# Altium PCB Audio.PcbDoc
Units mil, origin at the board's own origin, x right, y up, seen from the top; angles counter-clockwise.
Board outline 6000 x 4000 mil, 2 copper layers (Top Layer, Bottom Layer); 19 components, 22 nets, 99 pads, 9 vias.
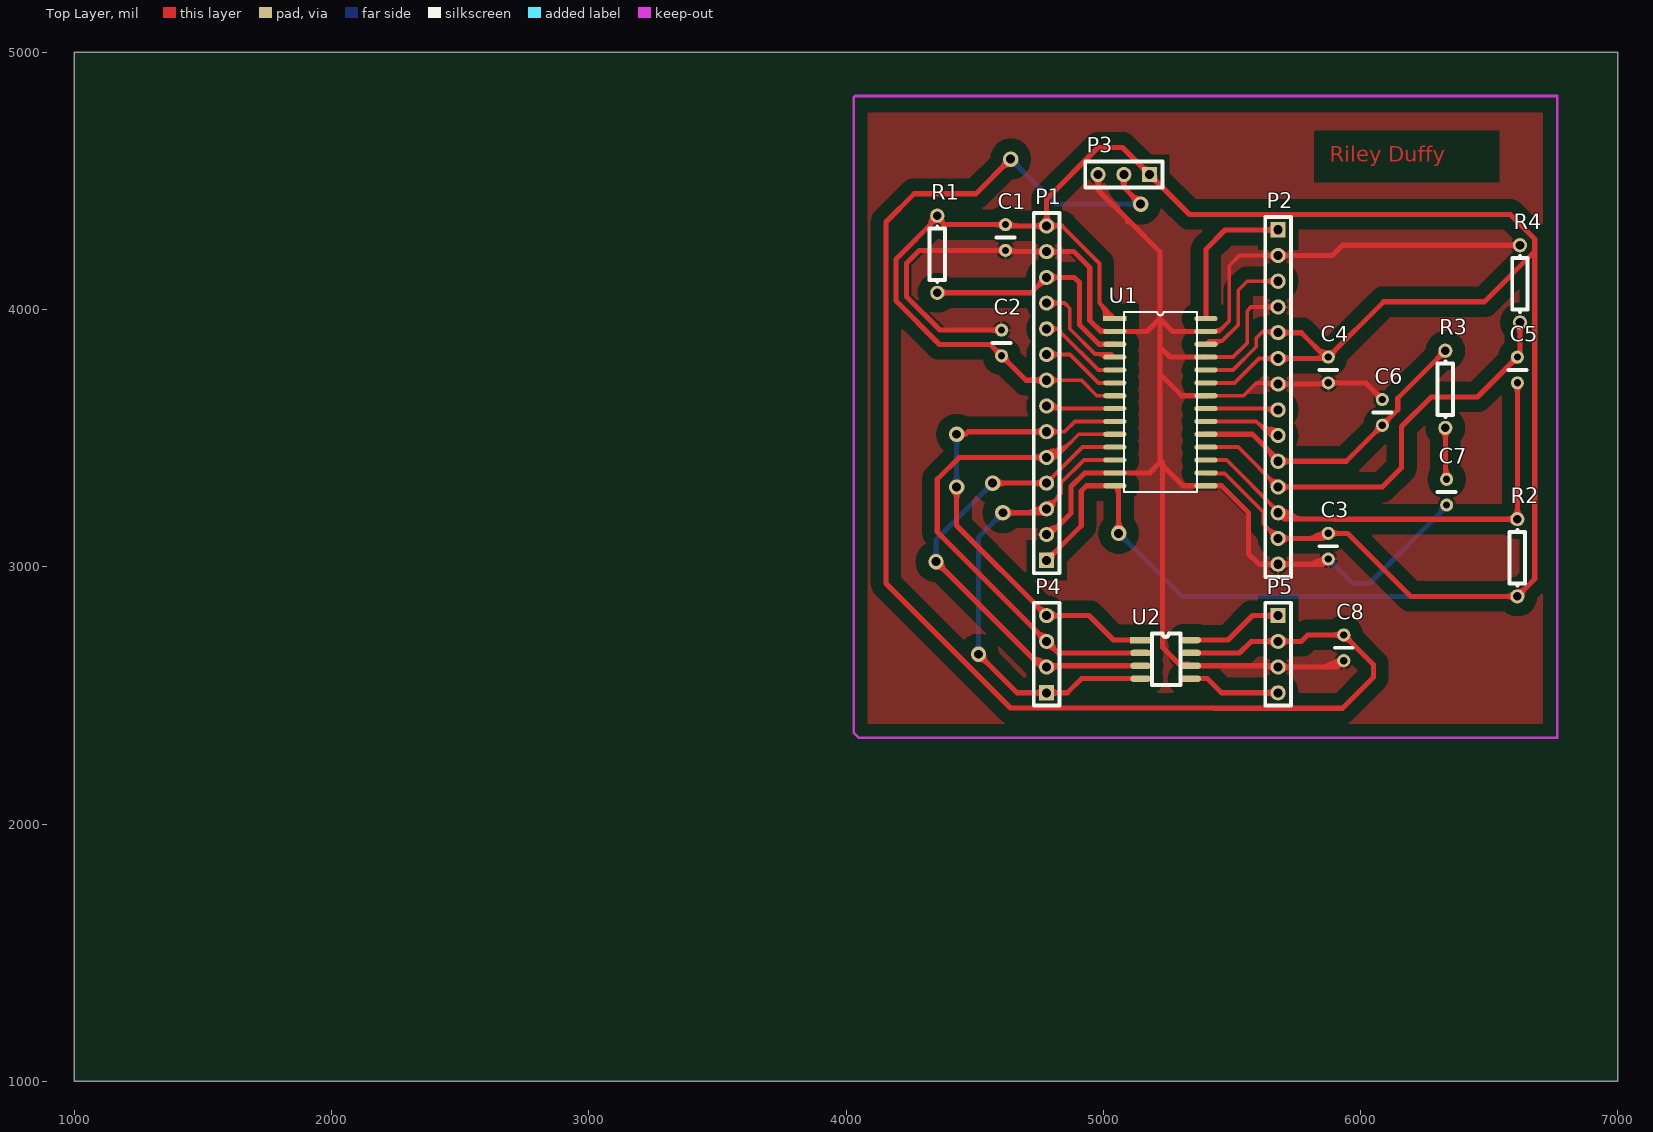
[diagram p0: Top Layer view]
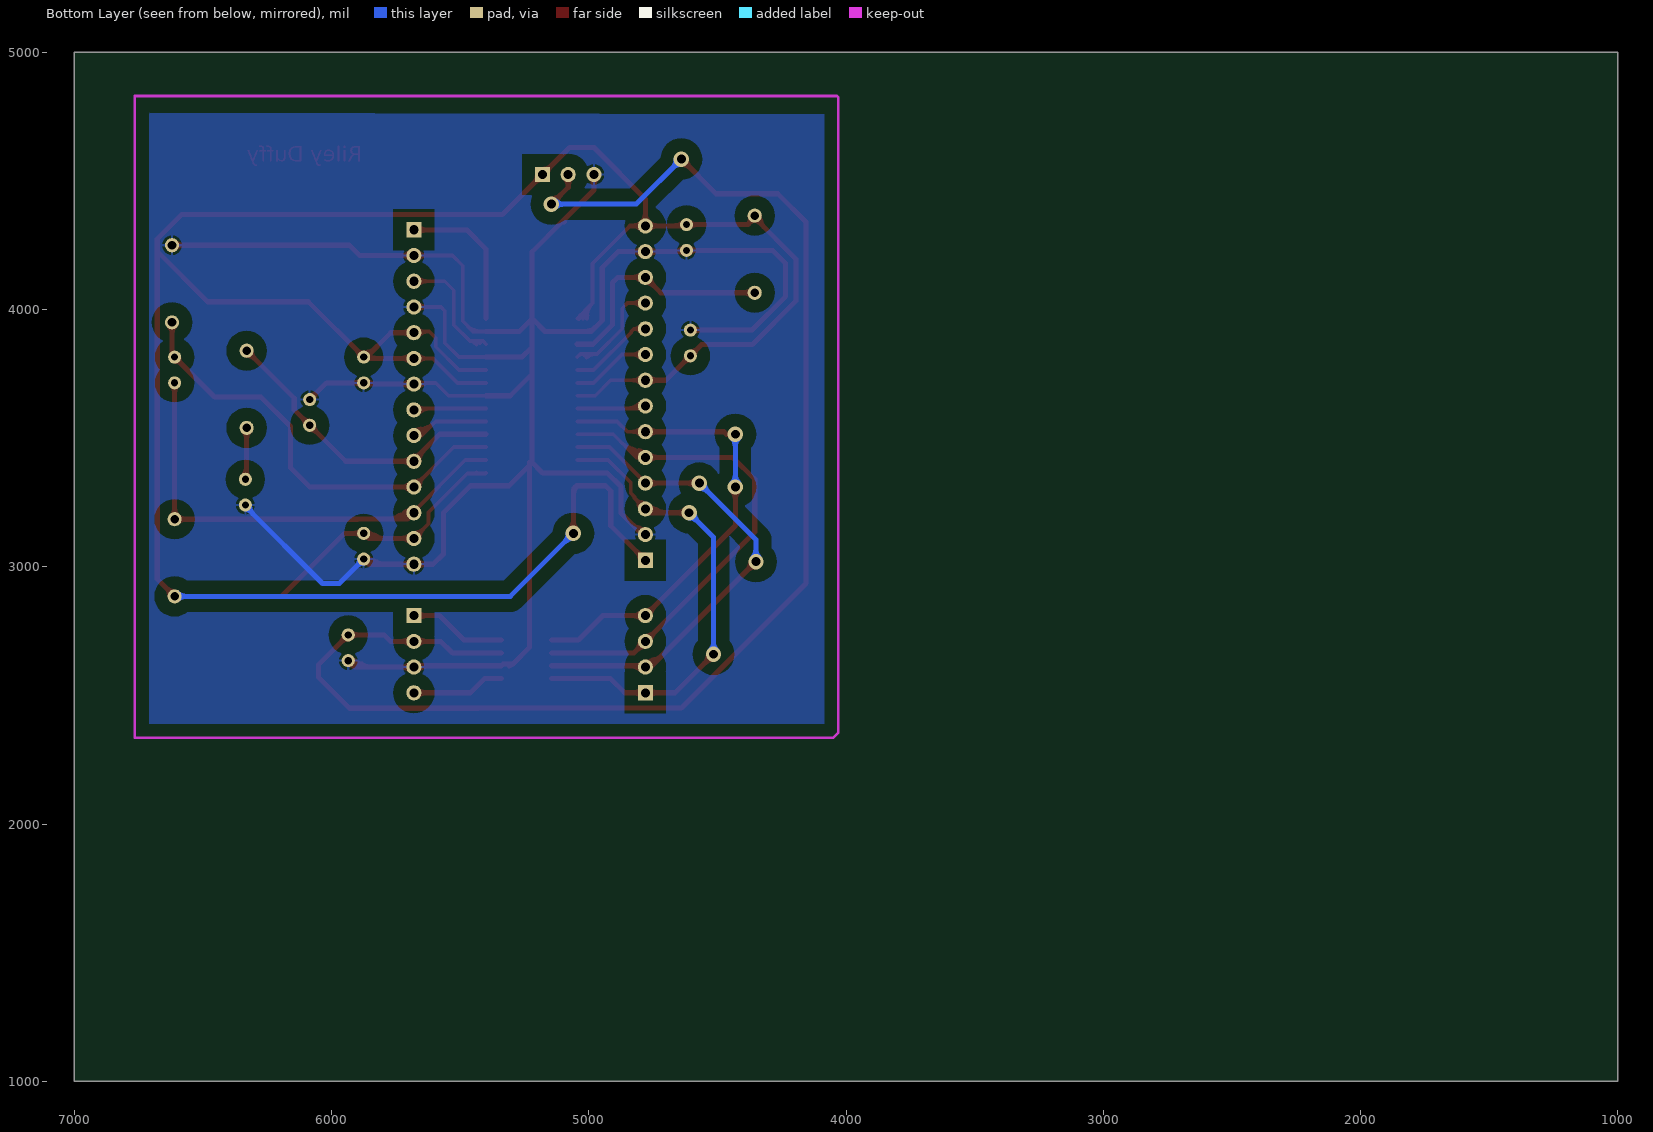
[diagram p1: Bottom Layer view, seen from below]

## Layer stack, top to bottom
Top Layer: signal copper 1.4
Dielectric: dielectric 12.6, FR-4, Dk 4.8
Bottom Layer: signal copper 1.4

## Board outline
1000,1000 7000,1000 7000,5000 1000,5000

## Design rules (kind name [scope] priority, off if disabled: settings)
Clearance Polygon [InPoly] p1: gap=50
Clearance [All] p2: gap=20
PolygonConnect [All] p1: connectstyle=Relief reliefconductorwidth=10 reliefentries=4 polygonreliefangle="90 Angle" airgapwidth=10
RoutingVias [All] p1: holewidth=28 width=50 viastyle="Through Hole" minholewidth=28 minwidth=50 maxholewidth=28 maxwidth=50
SMDNeckDown [All] p1: percent=50.000
SilkscreenOverComponentPads [All] p1: minsilkscreentomaskgap=10
SolderMaskExpansion [All] p1: expansion=4
Width "Near IC" [TouchesRoom('MP3Decode')] p1: maxlimit=10 minlimit=10 preferedwidth=10
Width [All] p2: maxlimit=30 minlimit=15 preferedwidth=20
27 further rules are at their usual default settings.

## Classes and differential pairs
component class "Components Class 1": U1

## Components (designator, comment, footprint, x,y, rotation, side; value= is the part's Value field where it differs from the comment)
C1 "Cap" "RADIAL CAPACITOR - 1uFT" 4620,4230 r270 top
C2 "Cap" "RADIAL CAPACITOR - 1uFT" 4605,3920 r90 top
C3 "Cap" "RADIAL CAPACITOR - 1uFT" 5875,3030 r270 top
C4 "Cap" "RADIAL CAPACITOR - 1uFT" 5875,3715 r270 top
C5 "Cap" "RADIAL CAPACITOR - 1uFT" 6610,3815 r90 top
C6 "Cap" "RADIAL CAPACITOR - 1uFT" 6085,3650 r90 top
C7 "Cap" "RADIAL CAPACITOR - 1uFT" 6335,3240 r270 top
C8 "Cap" "RADIAL CAPACITOR - 1uFT" 5935,2635 r270 top
P1 "Header 14" HDR1X14 4780,3025 r90 top
P2 "Header 14" HDR1X14 5680,4310 r270 top
P3 "Header 3" HDR1X3 5180,4525 r180 top
P4 "Header 4" HDR1X4 4780,2510 r90 top
P5 "Header 4" HDR1X4 5680,2810 r270 top
R1 "Res1" AXIAL-0.3 4355,4215 r90 top
R2 "Res1" AXIAL-0.3 6610,3035 r90 top
R3 "Res1" AXIAL-0.3 6330,3690 r270 top
R4 "Res1" AXIAL-0.3 6620,4100 r90 top
U1 "STA013_MP3Decode" SOP28 5045,3965 r0 top
U2 "MAX5556ESA+-ND" SOIC8_DAC 5145,2715 r0 top

## Footprints (in the part's own frame and the unit in brackets; to place one, negate y for a bottom-side part, rotate by r counter-clockwise, add the part's x,y. Pads: shape width x height; smd on the part's side, far side on the other; paste and mask are expansions set on the pad)
AXIAL-0.3 [mm] "Axial Device, Thru-Hole; 2 Leads; 0.3 in Pin Spacing"
  round 1.4 hole 0.85: 1(-3.81,0) 2(3.81,0)
  silkscreen extent -2.77,-0.76 2.77,0.76
HDR1X3 [mm] "Connector; Header; 3 Position"
  rect 1.5x1.5 hole 0.9: 1(0,0)
  round 1.5 hole 0.9: 2(2.54,0) 3(5.08,0)
  silkscreen extent -1.27,-1.27 6.35,1.27
HDR1X4 [mm] "Connector; Header; 4 Position"
  rect 1.5x1.5 hole 0.9: 1(0,0)
  round 1.5 hole 0.9: 2(2.54,0) 3(5.08,0) 4(7.62,0)
  silkscreen extent -1.27,-1.27 8.89,1.27
HDR1X14 [mm] "Connector; Header; 14 Position"
  rect 1.5x1.5 hole 0.9: 1(0,0)
  round 1.5 hole 0.9: 2(2.54,0) 3(5.08,0) 4(7.62,0) 5(10.16,0) 6(12.7,0) 7(15.24,0) 8(17.78,0) 9(20.32,0) 10(22.86,0) 11(25.4,0) 12(27.94,0) 13(30.48,0) 14(33.02,0)
  silkscreen extent -1.27,-1.27 34.29,1.27
"RADIAL CAPACITOR - 1uFT" [mil]
  round 51 hole 28: 1(0,0) 2(-100,0)
  silkscreen extent -50,-35 -50,35
SOIC8_DAC [mil]
  rect 80x25 smd: 1(0,0)
  oval 80x25 smd: 2(0,-50) 3(0,-100) 4(0,-150) 5(195,-150) 6(195,-100) 7(195,-50) 8(195,0)
  silkscreen extent 45,-175 155,25
SOP28 [mil]
  rect 90x20 smd: 1(0,0)
  oval 90x20 smd: 2(0,-50) 3(0,-100) 4(0,-150) 5(0,-200) 6(0,-250) 7(0,-300) 8(0,-350) 9(0,-400) 10(0,-450) 11(0,-500) 12(0,-550) 13(0,-600) 14(0,-650) 15(354.33,-650) 16(354.33,-600) 17(354.33,-550) 18(354.33,-500) 19(354.33,-450) 20(354.33,-400) 21(354.33,-350) 22(354.33,-300) 23(354.33,-250) 24(354.33,-200) 25(354.33,-150) 26(354.33,-100) 27(354.33,-50) 28(354.33,0)
  silkscreen extent 35,-675 320,25

## Part data
C1 C2 C3 C4 C5 C6 C7 C8: "Capacitor"
P1 P2: "Header, 14-Pin"
P3: "Header, 3-Pin"
P4 P5: "Header, 4-Pin"
R1 R2 R3 R4: "Resistor"

## Via types
v1: diameter 60, hole 34.53, Top Layer to Bottom Layer, 9 vias

## Nets (pads, with @x,y where several pads share a name; then routed paths per layer and width w, separated by ;. In a path a pad name is that pad's centre, name@x,y a point inside that pad or via, vN(x,y) a via of type N, cw(c..) or ccw(c..) an arc to the next point about the centre after c; other vN are vias at no path point)
3.3V: C1.2 C2.2 C3.2 C4.2 P1.1 P1.8 P1.14 P2.5 P2.6 P2.13 P3.1 R1.2 R2.1 U1.1 U1.7 U1.14 U1.16 U1.23 U1.24 | length 16830.5
  Top Layer w15: P1.8 4915,3725 4975,3665 U1.7 ; 4839.21,4325 4985,4179.21 4985,4025 ; 5005.32,3976.17 ccw(c5019.33,3978.95) U1.1@5011.39,3967.08 ; U1.1 4985,4025 ; U1.16 5401.58,3362.75 5472.25,3362.75 5622.97,3212.03 5622.97,3167.03 P2.13 ; U1.23 5510,3715 5605,3810 P2.6 ; U1.24 5504.5,3765 5595,3855.5 5595,3890 5620,3915 ; 5664.71,3136.12 cw(c5656.42,3105.17) P2.13@5687.81,3111.6 ; P2.5 5675,3915 5620,3915 ; 4833.18,3725 cw(c4833.18,3778.18) 4795.58,3740.58 ccw(c4833.18,3778.18) 4833.18,3725 ; 4833.18,3725 ccw(c4833.18,3671.82) 4795.58,3709.42 cw(c4833.18,3671.82) 4833.18,3725 ; 4985,4025 cw(c4930.27,3970.26) 5007.51,3965.16 ccw(c4930.27,3970.26) 4985,4025 ; 5620,3915 cw(c5620,3856.92) 5663.5,3895.4 ccw(c5620,3856.92) 5620,3915 ; 5626.82,3810 cw(c5626.82,3756.82) 5664.42,3794.42 ccw(c5626.82,3756.82) 5626.82,3810 ; 5626.82,3810 ccw(c5626.82,3863.18) 5664.42,3825.58 cw(c5626.82,3863.18) 5626.82,3810 ; 5642.4,3147.6 cw(c5604.79,3110) 5657.97,3110 ccw(c5604.79,3110) 5642.4,3147.6 ; 5642.4,3147.6 ccw(c5680,3185.21) 5680,3132.03 cw(c5680,3185.21) 5642.4,3147.6 ; 5008.4,4001.6 cw(c4974.16,3967.37) 5022.47,3964.18 ccw(c4974.16,3967.37) 5008.4,4001.6 ; 5031.79,3978.21 cw(c5018.05,3964.47) 5037.44,3963.19 ccw(c5018.05,3964.47) 5031.79,3978.21 ; U1.16@5436.1,3366.77 ccw(c5445.8,3376.46) 5445.8,3362.75 cw(c5445.8,3376.46) U1.16@5436.1,3366.77 ; 5638.89,3915 ccw(c5638.89,3951.11) 5664.42,3925.58 cw(c5638.89,3951.11) 5638.89,3915
  Top Layer w20: 4331.39,4342.41 cw(c4366.7,4332.95) R1.2@4354.16,4367.29 ; R1.2 R1.2@4355,4356.57 ; P1.1 4914.53,3159.53 4914.53,3294.53 4935,3315 U1.14 ; P1.8 4700,3725 C2.2 4560.5,3864.5 4363.93,3864.5 4195,4033.43 4195,4196.57 R1.2@4355,4356.57 ; 4839.21,4325 P1.14 ; v1(5060,3130) 5060,3300 U1.14 ; P2.13 5855,3110 ; P2.6 C4.2@5870,3810 ; P2.5 5770,3910 C4.2@5870,3810 ; 5824.14,3117.93 cw(c5844.59,3082.51) C3.2@5866.64,3116.95 ; 5850.27,3110.7 ccw(c5840.9,3126.93) C3.2@5859.56,3128.61 ; 5853.85,3112.77 cw(c5865.14,3093.22) C3.2@5870.99,3115.03 ; 5858.36,3834.96 cw(c5850.26,3804.75) C4.2@5879.16,3816.72 ; R2.1@6607.61,2885.49 cw(c6635.74,2879.73) 6628.31,2907.46 ; R2.1@6610.49,2882.61 ccw(c6604.73,2910.74) 6632.46,2903.31 ; R1.2@4355,4347.44 ccw(c4355,4325.41) 4339.42,4340.99 cw(c4355,4325.41) R1.2@4355,4347.44 ; R1.2@4355,4347.44 cw(c4355,4325.41) 4370.58,4340.99 ccw(c4355,4325.41) R1.2@4355,4347.44 ; R1.2@4355,4356.57 4381.57,4330 ; 4381.57,4330 cw(c4405.95,4354.39) 4372.19,4361.42 ccw(c4405.95,4354.39) 4381.57,4330 ; 4381.57,4330 C1.2 4625,4325 P1.14 ; 4578.54,3846.46 cw(c4552.08,3820) 4589.5,3820 ccw(c4552.08,3820) 4578.54,3846.46 ; 4578.54,3846.46 ccw(c4605,3872.92) 4605,3835.5 cw(c4605,3872.92) 4578.54,3846.46 ; 4582.58,4330 cw(c4582.58,4292.58) 4609.04,4319.04 ccw(c4582.58,4292.58) 4582.58,4330 ; 4582.58,4330 ccw(c4582.58,4367.42) 4609.04,4340.96 cw(c4582.58,4367.42) 4582.58,4330 ; 4631.46,3793.54 cw(c4657.92,3820) 4620.5,3820 ccw(c4657.92,3820) 4631.46,3793.54 ; 4631.46,3793.54 ccw(c4605,3767.08) 4605,3804.5 cw(c4605,3767.08) 4631.46,3793.54 ; 4732.86,3725 cw(c4732.86,3677.86) 4766.19,3711.19 ccw(c4732.86,3677.86) 4732.86,3725 ; 4732.86,3725 ccw(c4732.86,3772.14) 4766.19,3738.81 cw(c4732.86,3772.14) 4732.86,3725 ; 4732.86,4325 cw(c4732.86,4277.86) 4766.19,4311.19 ccw(c4732.86,4277.86) 4732.86,4325 ; 4732.86,4325 ccw(c4732.86,4372.14) P1.14@4766.19,4338.81 ; 4732.86,4325 ccw(c4732.86,4372.14) P1.14@4766.19,4338.81 ; P1.14@4766.19,4338.81 ccw(c4732.86,4372.14) 4780,4372.14 ; P1.14@4766.19,4338.81 ccw(c4732.86,4372.14) 4780,4372.14 ; P1.14 4780,4430 4980,4630 5075,4630 P3.1 5335.47,4369.53 6581.87,4369.53 6677.56,4273.84 6677.56,4226.16 ; 4780,4372.14 ccw(c4827.14,4372.14) P1.14@4793.81,4338.81 ; 4780,4372.14 ccw(c4827.14,4372.14) P1.14@4793.81,4338.81 ; P1.14@4793.81,4338.81 ccw(c4827.14,4372.14) 4827.14,4325 ; P1.14@4793.81,4338.81 ccw(c4827.14,4372.14) 4827.14,4325 ; 4813.34,3058.34 cw(c4780,3091.67) 4780,3044.53 ccw(c4780,3091.67) 4813.34,3058.34 ; 4813.34,3058.34 ccw(c4846.67,3025) 4799.53,3025 cw(c4846.67,3025) 4813.34,3058.34 ; 4827.14,4325 ccw(c4827.14,4277.86) 4793.81,4311.19 cw(c4827.14,4277.86) 4827.14,4325 ; U1.14 cw(c5008.79,3278.79) 5060,3278.79 ccw(c5008.79,3278.79) U1.14 ; U1.14 cw(c5037.5,3293.79) 5060,3293.79 ccw(c5037.5,3293.79) U1.14 ; 5060,3178.28 cw(c5011.72,3178.28) 5045.86,3144.14 ccw(c5011.72,3178.28) 5060,3178.28 ; 5060,3178.28 ccw(c5108.28,3178.28) 5074.14,3144.14 cw(c5108.28,3178.28) 5060,3178.28 ; 5146.66,4558.34 cw(c5113.33,4525) 5160.47,4525 ccw(c5113.33,4525) 5146.66,4558.34 ; 5146.66,4558.34 ccw(c5180,4591.67) 5180,4544.53 cw(c5180,4591.67) 5146.66,4558.34 ; 5213.34,4491.66 cw(c5246.67,4525) 5199.53,4525 ccw(c5246.67,4525) 5213.34,4491.66 ; 5213.34,4491.66 ccw(c5180,4458.33) 5180,4505.47 cw(c5180,4458.33) 5213.34,4491.66 ; 5727.14,3110 cw(c5727.14,3157.14) 5693.81,3123.81 ccw(c5727.14,3157.14) 5727.14,3110 ; 5727.14,3110 ccw(c5727.14,3062.86) 5693.81,3096.19 cw(c5727.14,3062.86) 5727.14,3110 ; 5727.14,3810 cw(c5727.14,3857.14) 5693.81,3823.81 ccw(c5727.14,3857.14) 5727.14,3810 ; 5727.14,3810 ccw(c5727.14,3762.86) 5693.81,3796.19 cw(c5727.14,3762.86) 5727.14,3810 ; 5727.14,3910 cw(c5727.14,3957.14) 5693.81,3923.81 ccw(c5727.14,3957.14) 5727.14,3910 ; 5727.14,3910 ccw(c5727.14,3862.86) 5693.81,3896.19 cw(c5727.14,3862.86) 5727.14,3910 ; 5855,3110 cw(c5867.77,3097.23) 5871.66,3114.86 ccw(c5867.77,3097.23) 5855,3110 ; 5855,3110 ccw(c5842.23,3122.77) 5859.86,3126.66 cw(c5842.23,3122.77) 5855,3110 ; 5855,3110 C3.2 5950,3130 6195,2885 R2.1 6677.56,2952.56 6677.56,4226.16 ; C4.2@5870,3810 C4.2 6090.47,4030.47 6481.87,4030.47 6677.56,4226.16 ; C4.2@5875,3830.5 cw(c5875,3892.06) 5831.47,3848.53 ccw(c5875,3892.06) C4.2@5875,3830.5 ; C4.2@5875,3830.5 ccw(c5875,3867.92) 5901.46,3841.46 ; C4.2@5875,3830.5 ccw(c5875,3867.92) 5901.46,3841.46 ; 5901.46,3841.46 ccw(c5927.92,3815) 5890.5,3815 cw(c5927.92,3815) 5901.46,3841.46 ; 5912.42,3130 cw(c5912.42,3167.42) 5885.96,3140.96 ccw(c5912.42,3167.42) 5912.42,3130 ; 5912.42,3130 ccw(c5912.42,3092.58) 5885.96,3119.04 cw(c5912.42,3092.58) 5912.42,3130 ; 6567.61,2885 cw(c6567.61,2842.61) 6597.58,2872.58 ccw(c6567.61,2842.61) 6567.61,2885 ; 6567.61,2885 ccw(c6567.61,2927.39) 6597.58,2897.42 cw(c6567.61,2927.39) 6567.61,2885 ; 6639.98,2914.98 cw(c6610,2944.95) 6610,2902.56 ccw(c6610,2944.95) 6639.98,2914.98 ; 6639.98,2914.98 ccw(c6669.95,2885) 6627.56,2885 cw(c6669.95,2885) 6639.98,2914.98 ; 4319.06,4320.63 ccw(c4274.69,4365) 4337.44,4365 cw(c4274.69,4365) 4319.06,4320.63 ; C1.2@4630.96,4319.04 cw(c4645.35,4304.65) 4645.35,4325 ccw(c4645.35,4304.65) C1.2@4630.96,4319.04 ; C1.2@4630.96,4340.96 ccw(c4669.49,4379.49) 4669.49,4325 cw(c4669.49,4379.49) C1.2@4630.96,4340.96 ; 5789.3,3110 ccw(c5789.3,3215.7) 5864.04,3140.96 cw(c5789.3,3215.7) 5789.3,3110 ; 5825.51,3810 ccw(c5825.51,3864.49) 5864.04,3825.96 cw(c5825.51,3864.49) 5825.51,3810 ; 5837.58,3110 ccw(c5837.58,3167.42) 5878.18,3126.82 cw(c5837.58,3167.42) 5837.58,3110 ; 5849.65,3810 cw(c5849.65,3789.65) 5864.04,3804.04 ccw(c5849.65,3789.65) 5849.65,3810
  Bottom Layer w20: v1@5060,3135 v1(5060,3130) 5305,2885 R2.1 ; 5094.14,3095.86 cw(c5128.28,3130) 5080,3130 ccw(c5128.28,3130) 5094.14,3095.86 ; 5094.14,3095.86 ccw(c5060,3061.72) 5060,3110 cw(c5060,3061.72) 5094.14,3095.86 ; 6567.61,2885 cw(c6567.61,2842.61) 6597.58,2872.58 ccw(c6567.61,2842.61) 6567.61,2885 ; 6567.61,2885 ccw(c6567.61,2927.39) 6597.58,2897.42 cw(c6567.61,2927.39) 6567.61,2885
FILT: C6.2 P2.10 R3.1 U1.19 | length 1984.5
  Top Layer w20: U1.19 5580,3515 5680,3415 P2.10 5945,3410 6145,3610 6145,3655 R3.1 ; 5653.3,3436.75 ccw(c5690.81,3446.81) P2.10@5679.87,3409.55 ; 5659.03,3435.15 cw(c5651.48,3406.99) P2.10@5680.47,3410.05 ; 6307.54,3821.69 cw(c6335.27,3814.26) R3.1@6329.51,3842.39 ; 6311.69,3817.54 ccw(c6304.26,3845.27) R3.1@6332.39,3839.51 ; 5727.14,3410 cw(c5727.14,3457.14) 5693.81,3423.81 ccw(c5727.14,3457.14) 5727.14,3410 ; 5727.14,3410 ccw(c5727.14,3362.86) 5693.81,3396.19 cw(c5727.14,3362.86) 5727.14,3410 ; 6058.54,3523.54 cw(c6085,3497.08) 6085,3534.5 ccw(c6085,3497.08) 6058.54,3523.54 ; 6058.54,3523.54 ccw(c6032.08,3550) 6069.5,3550 cw(c6032.08,3550) 6058.54,3523.54 ; 6111.46,3576.46 cw(c6085,3602.92) 6085,3565.5 ccw(c6085,3602.92) 6111.46,3576.46 ; 6111.46,3576.46 ccw(c6137.92,3550) 6100.5,3550 cw(c6137.92,3550) 6111.46,3576.46 ; 6300.02,3810.02 cw(c6330,3780.05) 6330,3822.44 ccw(c6330,3780.05) 6300.02,3810.02 ; 6300.02,3810.02 ccw(c6270.05,3840) 6312.44,3840 cw(c6270.05,3840) 6300.02,3810.02 ; 5643.13,3451.87 cw(c5601.26,3410) 5660.47,3410 ccw(c5601.26,3410) 5643.13,3451.87 ; 5655.2,3439.8 ccw(c5680,3464.6) 5680,3429.53 cw(c5680,3464.6) 5655.2,3439.8
GROUND: C1.1 C2.1 C3.1 C4.1 C6.1 C7.1 C8.1 P1.2 P1.13 P2.2 P2.4 P2.7 P2.14 P3.3 P5.3 R4.2 U1.2 U1.13 U1.15 U1.22 U1.25 U1.27 U2.6 | length 14242
  Top Layer w15: U1.22 5545,3665 5595,3715 5675,3715 P2.7 ; U1.25 5505,3815 5560,3870 5560,3995 5575,4010 P2.4 ; U1.27 5450,3915 5490,3955 5490,4170 5530,4210 P2.2 ; U1.27@5436.5,3913.75 cw(c5448.86,3906.61) 5445.17,3920.4 ; 5626.82,4010 cw(c5626.82,3956.82) 5664.42,3994.42 ccw(c5626.82,3956.82) 5626.82,4010 ; 5626.82,4010 ccw(c5626.82,4063.18) 5664.42,4025.58 cw(c5626.82,4063.18) 5626.82,4010 ; 5626.82,4210 cw(c5626.82,4156.82) 5664.42,4194.42 ccw(c5626.82,4156.82) 5626.82,4210 ; 5626.82,4210 ccw(c5626.82,4263.18) 5664.42,4225.58 cw(c5626.82,4263.18) 5626.82,4210 ; U1.27@5434.33,3917.5 ccw(c5434.33,3961.36) 5465.35,3930.35 cw(c5434.33,3961.36) U1.27@5434.33,3917.5 ; 5614.75,3715 cw(c5614.75,3644.75) 5664.42,3694.42 ccw(c5614.75,3644.75) 5614.75,3715 ; 5638.89,3715 ccw(c5638.89,3751.11) 5664.42,3725.58 cw(c5638.89,3751.11) 5638.89,3715
  Top Layer w20: C2.1 4365,3920 4235,4050 4235,4180 4285,4230 C1.1 4625,4225 P1.13 4886.18,4225 4947.5,4163.68 4947.5,3957.5 4990,3915 U1.2 5170,3915 5220,3965 ; P1.2@4774.64,3126.1 4792.94,3126.1 4874.53,3207.68 4874.53,3311.49 4928.03,3365 U1.13 5180,3365 5220,3405 ; P1.2@4779.56,3125.18 cw(c4822.77,3107.76) 4810.71,3152.76 ; P3.3 4980,4465 5105,4340 ; 5095,4340 5105,4340 ; 5230,3407.6 5230,2687.4 5294.9,2622.5 ; U1.22 5305,3665 5220,3750 ; U1.25 5260,3815 5220,3855 ; U1.27 5270,3915 5220,3965 ; P5.3@5675,2615 U2.6 5332.5,2622.5 5294.9,2622.5 ; P5.3 5910,2610 ; P2.7 5870,3710 C4.1 6020,3715 C6.1 ; P2.2 5890,4210 5930,4250 R4.2 ; 5824.14,3017.93 cw(c5844.59,2982.51) C3.1@5866.64,3016.95 ; 5850.27,3010.7 ccw(c5840.9,3026.93) C3.1@5859.56,3028.61 ; 5853.85,3012.77 cw(c5865.14,2993.22) C3.1@5870.99,3015.03 ; C3.1 5855,3010 ; 5876.49,2618.51 cw(c5904.84,2569.41) C8.1@5928.52,2620.92 ; 5902.62,2611.28 ccw(c5885.35,2641.19) C8.1@5919.62,2636.92 ; 5913.85,2617.77 cw(c5925.14,2598.22) C8.1@5930.99,2620.03 ; C8.1 5910,2610 ; 4567.58,3920 cw(c4567.58,3882.58) 4594.04,3909.04 ccw(c4567.58,3882.58) 4567.58,3920 ; 4567.58,3920 ccw(c4567.58,3957.42) 4594.04,3930.96 cw(c4567.58,3957.42) 4567.58,3920 ; 4582.58,4230 cw(c4582.58,4192.58) 4609.04,4219.04 ccw(c4582.58,4192.58) 4582.58,4230 ; 4582.58,4230 ccw(c4582.58,4267.42) 4609.04,4240.96 cw(c4582.58,4267.42) 4582.58,4230 ; 4732.86,4225 cw(c4732.86,4177.86) 4766.19,4211.19 ccw(c4732.86,4177.86) 4732.86,4225 ; 4732.86,4225 ccw(c4732.86,4272.14) 4766.19,4238.81 cw(c4732.86,4272.14) 4732.86,4225 ; 4827.14,4225 cw(c4827.14,4272.14) 4793.81,4238.81 ccw(c4827.14,4272.14) 4827.14,4225 ; 4827.14,4225 ccw(c4827.14,4177.86) 4793.81,4211.19 cw(c4827.14,4177.86) 4827.14,4225 ; 4980,4477.86 cw(c5027.14,4477.86) 4993.81,4511.19 ccw(c5027.14,4477.86) 4980,4477.86 ; 4980,4477.86 ccw(c4932.86,4477.86) 4966.19,4511.19 cw(c4932.86,4477.86) 4980,4477.86 ; 5105,4340 5220,4225 5220,3965 ; 5220,3405 5310,3315 U1.15 5460,3315 5565,3210 5565,3050 5605,3010 P2.14 5855,3010 ; 5220,3405 5220,3750 ; 5220,3750 5220,3855 ; 5220,3855 5220,3965 ; 5294.9,2622.5 ccw(c5308.09,2635.69) 5311.98,2617.45 cw(c5308.09,2635.69) 5294.9,2622.5 ; 5294.9,2622.5 cw(c5294.9,2604.51) 5310.35,2613.72 ccw(c5294.9,2604.51) 5294.9,2622.5 ; 5632.86,3010 cw(c5632.86,2962.86) 5666.19,2996.19 ccw(c5632.86,2962.86) 5632.86,3010 ; 5632.86,3010 ccw(c5632.86,3057.14) 5666.19,3023.81 cw(c5632.86,3057.14) 5632.86,3010 ; 5727.14,2610 cw(c5727.14,2657.14) 5693.81,2623.81 ccw(c5727.14,2657.14) 5727.14,2610 ; 5727.14,2610 ccw(c5727.14,2562.86) 5693.81,2596.19 cw(c5727.14,2562.86) 5727.14,2610 ; 5727.14,3010 cw(c5727.14,3057.14) 5693.81,3023.81 ccw(c5727.14,3057.14) 5727.14,3010 ; 5727.14,3010 ccw(c5727.14,2962.86) 5693.81,2996.19 cw(c5727.14,2962.86) 5727.14,3010 ; 5727.14,3710 cw(c5727.14,3757.14) 5693.81,3723.81 ccw(c5727.14,3757.14) 5727.14,3710 ; 5727.14,3710 ccw(c5727.14,3662.86) 5693.81,3696.19 cw(c5727.14,3662.86) 5727.14,3710 ; 5727.14,4210 cw(c5727.14,4257.14) 5693.81,4223.81 ccw(c5727.14,4257.14) 5727.14,4210 ; 5727.14,4210 ccw(c5727.14,4162.86) 5693.81,4196.19 cw(c5727.14,4162.86) 5727.14,4210 ; 5855,3010 cw(c5867.77,2997.23) 5871.66,3014.86 ccw(c5867.77,2997.23) 5855,3010 ; 5855,3010 ccw(c5842.23,3022.77) 5859.86,3026.66 cw(c5842.23,3022.77) 5855,3010 ; 5910,2610 cw(c5933.03,2586.97) 5934.36,2619.51 ccw(c5933.03,2586.97) 5910,2610 ; 5910,2610 ccw(c5886.97,2633.03) 5919.51,2634.36 cw(c5886.97,2633.03) 5910,2610 ; 5912.42,3715 cw(c5912.42,3752.42) 5885.96,3725.96 ccw(c5912.42,3752.42) 5912.42,3715 ; 5912.42,3715 ccw(c5912.42,3677.58) 5885.96,3704.04 cw(c5912.42,3677.58) 5912.42,3715 ; 6058.54,3676.46 cw(c6032.08,3650) 6069.5,3650 ccw(c6032.08,3650) 6058.54,3676.46 ; 6058.54,3676.46 ccw(c6085,3702.92) 6085,3665.5 cw(c6085,3702.92) 6058.54,3676.46 ; 6577.61,4250 cw(c6577.61,4207.61) 6607.58,4237.58 ccw(c6577.61,4207.61) 6577.61,4250 ; 6577.61,4250 ccw(c6577.61,4292.39) 6607.58,4262.42 cw(c6577.61,4292.39) 6577.61,4250 ; C1.1@4630.96,4219.04 cw(c4645.35,4204.65) 4645.35,4225 ccw(c4645.35,4204.65) C1.1@4630.96,4219.04 ; C1.1@4630.96,4240.96 ccw(c4669.49,4279.49) 4669.49,4225 cw(c4669.49,4279.49) C1.1@4630.96,4240.96 ; P1.2@4780,3144.53 ccw(c4780,3220.26) 4833.55,3166.71 cw(c4780,3220.26) P1.2@4780,3144.53 ; 4975.86,3929.14 ccw(c5010,3963.28) 5010,3915 cw(c5010,3963.28) 4975.86,3929.14 ; 5290.98,2626.41 ccw(c5312.5,2647.93) 5312.5,2617.5 cw(c5312.5,2647.93) 5290.98,2626.41 ; 5620.79,2615 cw(c5620.79,2550.79) 5666.19,2596.19 ccw(c5620.79,2550.79) 5620.79,2615 ; 5644.93,2615 ccw(c5644.93,2645.07) 5666.19,2623.81 cw(c5644.93,2645.07) 5644.93,2615 ; 5789.3,3010 ccw(c5789.3,3115.7) 5864.04,3040.96 cw(c5789.3,3115.7) 5789.3,3010 ; 5825.51,3710 ccw(c5825.51,3764.49) 5864.04,3725.96 cw(c5825.51,3764.49) 5825.51,3710 ; 5837.22,2610 ccw(c5837.22,2732.78) 5924.04,2645.96 cw(c5837.22,2732.78) 5837.22,2610 ; 5837.58,3010 ccw(c5837.58,3067.42) 5878.18,3026.82 cw(c5837.58,3067.42) 5837.58,3010 ; 5849.65,3710 cw(c5849.65,3689.65) 5864.04,3704.04 ccw(c5849.65,3689.65) 5849.65,3710 ; 5885.51,2610 ccw(c5885.51,2684.49) 5938.18,2631.82 cw(c5885.51,2684.49) 5885.51,2610
  Bottom Layer w20: C3.1 5970,2935 6035,2935 6335,3235 C7.1 ; 5901.46,3003.54 cw(c5927.92,3030) 5890.5,3030 ccw(c5927.92,3030) 5901.46,3003.54 ; 5901.46,3003.54 ccw(c5875,2977.08) 5875,3014.5 cw(c5875,2977.08) 5901.46,3003.54 ; 6305,3205 ccw(c6270.01,3240) 6319.5,3240 cw(c6270.01,3240) 6305,3205 ; 6317.08,3217.08 cw(c6335,3199.15) 6335,3224.5 ccw(c6335,3199.15) 6317.08,3217.08
LCKT: P1.4 P4.2 U1.11 U2.3 | length 3120.6
  Top Layer w15: P1.4 4920,3465 U1.11
  Top Layer w20: 4375.2,2993.25 cw(c4384.24,3027.01) v1(4350,3020) ; 4376.75,2994.8 ccw(c4342.99,2985.76) v1(4350,3020) ; v1(4570,3325) P1.4 ; 4744.57,2639.02 cw(c4729.82,2583.95) P4.2@4780.42,2610.22 ; P4.2@4760,2610 v1(4350,3020) ; P4.2@4785,2615 U2.3 ; 4384.14,2985.86 cw(c4418.28,3020) 4370,3020 ccw(c4418.28,3020) 4384.14,2985.86 ; 4384.14,2985.86 ccw(c4350,2951.72) 4350,3000 cw(c4350,2951.72) 4384.14,2985.86 ; 4618.28,3325 cw(c4618.28,3373.28) 4584.14,3339.14 ccw(c4618.28,3373.28) 4618.28,3325 ; 4618.28,3325 ccw(c4618.28,3276.72) 4584.14,3310.86 cw(c4618.28,3276.72) 4618.28,3325 ; 4732.86,3325 cw(c4732.86,3277.86) 4766.19,3311.19 ccw(c4732.86,3277.86) 4732.86,3325 ; 4732.86,3325 ccw(c4732.86,3372.14) 4766.19,3338.81 cw(c4732.86,3372.14) 4732.86,3325 ; 4712.52,2657.48 ccw(c4780,2724.96) 4780,2629.53 cw(c4780,2724.96) 4712.52,2657.48 ; 4746.66,2623.34 ccw(c4780,2656.67) 4780,2609.53 cw(c4780,2656.67) 4746.66,2623.34 ; P4.2@4793.81,2596.19 cw(c4839.21,2550.79) 4839.21,2615 ccw(c4839.21,2550.79) P4.2@4793.81,2596.19 ; P4.2@4793.81,2623.81 ccw(c4815.07,2645.07) 4815.07,2615 cw(c4815.07,2645.07) P4.2@4793.81,2623.81
  Bottom Layer w20: v1(4350,3020) 4350,3105 v1(4570,3325) ; 4350,3068.28 cw(c4301.72,3068.28) 4335.86,3034.14 ccw(c4301.72,3068.28) 4350,3068.28 ; 4350,3068.28 ccw(c4398.28,3068.28) 4364.14,3034.14 cw(c4398.28,3068.28) 4350,3068.28 ; 4535.86,3290.86 cw(c4570,3256.72) 4570,3305 ccw(c4570,3256.72) 4535.86,3290.86 ; 4535.86,3290.86 ccw(c4501.72,3325) 4550,3325 cw(c4501.72,3325) 4535.86,3290.86
MCLK: P1.3 P4.1 U1.12 U2.4 | length 3317.9
  Top Layer w15: P1.3@4772.19,3226.6 cw(c4803.58,3220.17) 4795.29,3251.12 ; P1.3@4780.33,3224.67 4780.33,3225.33 4821.87,3266.87 4821.87,3271.07 4837.03,3286.22 4837.03,3327.03 4925,3415 U1.12 ; P1.3@4781.6,3217.19 ccw(c4775.17,3248.58) 4806.12,3240.29 ; 4817.6,3262.6 cw(c4780,3300.21) 4780,3247.03 ccw(c4780,3300.21) 4817.6,3262.6 ; 4817.6,3262.6 ccw(c4855.21,3225) 4802.03,3225 cw(c4855.21,3225) 4817.6,3262.6
  Top Layer w20: 4540.2,2633.25 cw(c4549.24,2667.01) v1(4515,2660) ; 4541.75,2634.8 ccw(c4507.99,2625.76) v1(4515,2660) ; v1(4610,3210) P1.3@4765,3210 ; 4731.53,3218.8 cw(c4744.6,3196.17) P1.3@4764.86,3212.67 ; U2.4 4915,2565 4860,2510 P4.1 4665,2510 v1(4515,2660) ; 4549.14,2625.86 cw(c4583.28,2660) 4535,2660 ccw(c4583.28,2660) 4549.14,2625.86 ; 4549.14,2625.86 ccw(c4515,2591.72) 4515,2640 cw(c4515,2591.72) 4549.14,2625.86 ; 4658.28,3210 cw(c4658.28,3258.28) 4624.14,3224.14 ccw(c4658.28,3258.28) 4658.28,3210 ; 4658.28,3210 ccw(c4658.28,3161.72) 4624.14,3195.86 cw(c4658.28,3161.72) 4658.28,3210 ; 4732.86,2510 cw(c4732.86,2462.86) 4766.19,2496.19 ccw(c4732.86,2462.86) 4732.86,2510 ; 4732.86,2510 ccw(c4732.86,2557.14) 4766.19,2523.81 cw(c4732.86,2557.14) 4732.86,2510 ; 4827.14,2510 cw(c4827.14,2557.14) 4793.81,2523.81 ccw(c4827.14,2557.14) 4827.14,2510 ; 4827.14,2510 ccw(c4827.14,2462.86) 4793.81,2496.19 cw(c4827.14,2462.86) 4827.14,2510 ; 4696.64,3210 ccw(c4696.64,3308.36) 4766.19,3238.81 cw(c4696.64,3308.36) 4696.64,3210 ; 4744.93,3210 ccw(c4744.93,3260.07) 4780.33,3224.67 cw(c4744.93,3260.07) 4744.93,3210
  Bottom Layer w20: v1(4515,2660) 4515,3115 v1(4610,3210) ; 4515,2708.28 cw(c4466.72,2708.28) 4500.86,2674.14 ccw(c4466.72,2708.28) 4515,2708.28 ; 4515,2708.28 ccw(c4563.28,2708.28) 4529.14,2674.14 cw(c4563.28,2708.28) 4515,2708.28 ; 4575.86,3175.86 cw(c4610,3141.72) 4610,3190 ccw(c4610,3141.72) 4575.86,3175.86 ; 4575.86,3175.86 ccw(c4541.72,3210) 4590,3210 cw(c4541.72,3210) 4575.86,3175.86
NetC7_2: C7.2 R3.2 | length 452.8
  Top Layer w20: R3.2 6330,3345 C7.2 ; 6330,3497.61 cw(c6372.39,3497.61) 6342.42,3527.58 ccw(c6372.39,3497.61) 6330,3497.61 ; 6330,3497.61 ccw(c6287.61,3497.61) 6317.58,3527.58 cw(c6287.61,3497.61) 6330,3497.61 ; C7.2@6324.04,3350.96 ccw(c6309.65,3365.35) 6330,3365.35 cw(c6309.65,3365.35) C7.2@6324.04,3350.96 ; 6330,3389.49 ccw(c6384.49,3389.49) 6345.96,3350.96 cw(c6384.49,3389.49) 6330,3389.49
NetP1_7: P1.7 U1.8 | length 514.6
  Top Layer w15: P1.7@4783.2,3628.2 4796.4,3615 U1.8 ; P1.7@4784.97,3629.97 ccw(c4821.11,3666.11) 4821.11,3615 cw(c4821.11,3666.11) P1.7@4784.97,3629.97 ; P1.7@4795.58,3609.42 cw(c4809.04,3595.96) 4809.04,3615 ccw(c4809.04,3595.96) P1.7@4795.58,3609.42 ; P1.7@4795.58,3640.58 ccw(c4857.32,3702.32) 4857.32,3615 cw(c4857.32,3702.32) P1.7@4795.58,3640.58
NetP1_9: P1.9 U1.6 | length 477.6
  Top Layer w15: P1.9 4871.4,3825 4981.4,3715 U1.6 ; 4833.18,3825 cw(c4833.18,3878.18) 4795.58,3840.58 ccw(c4833.18,3878.18) 4833.18,3825 ; 4833.18,3825 ccw(c4833.18,3771.82) 4795.58,3809.42 cw(c4833.18,3771.82) 4833.18,3825
NetP1_10: P1.10 U1.5 | length 460.9
  Top Layer w15: P1.10 4825,3925 ; U1.5 4980.9,3765 4835,3910.9 4835,3915 4825,3925 ; 4825,3925 cw(c4825,3959.94) 4797.4,3938.51 ccw(c4825,3959.94) 4825,3925 ; 4825,3925 ccw(c4825,3890.06) 4797.4,3911.49 cw(c4825,3890.06) 4825,3925
NetP1_11: P1.11 U1.4 | length 673.1
  Top Layer w15: P1.11 4850,4025 4870,4005 4870,3925.4 4967.9,3827.5 5032.5,3827.5 U1.4 ; 4998.52,3818.84 ccw(c5005.66,3831.21) U1.4@5009.35,3817.41 ; 4833.18,4025 cw(c4833.18,4078.18) 4795.58,4040.58 ccw(c4833.18,4078.18) 4833.18,4025 ; 4833.18,4025 ccw(c4833.18,3971.82) 4795.58,4009.42 cw(c4833.18,3971.82) 4833.18,4025 ; 4973.79,3827.5 cw(c4973.79,3778.79) 5008.23,3813.23 ccw(c4973.79,3778.79) 4973.79,3827.5 ; 5010,3827.5 cw(c5010,3815) 5018.84,3823.84 ccw(c5010,3815) 5010,3827.5
NetP2_1: P2.1 U1.28 | length 734.4
  Top Layer w20: U1.28 5399.33,4234.33 5473.9,4308.9 P2.1@5685.36,4308.9 ; 5630.21,4308.9 ccw(c5630.21,4359.79) 5666.19,4323.81 cw(c5630.21,4359.79) 5630.21,4308.9 ; 5635.51,4308.9 cw(c5635.51,4265.51) 5666.19,4296.19 ccw(c5635.51,4265.51) 5635.51,4308.9
NetP2_3: P2.3 U1.26 | length 816.8
  Top Layer w15: U1.26 5411.83,3877.5 5462,3877.5 ; U1.26@5434.01,3867.48 ccw(c5432.17,3881.64) 5443.49,3872.92 ; U1.26@5434.46,3867.5 ccw(c5435.23,3881.76) 5444.77,3871.13 ; P2.3 5560,4110 5525,4075 5525,3940.5 5462,3877.5 ; 5434.33,3877.5 ccw(c5434.33,3865) 5422.79,3869.81 cw(c5434.33,3865) 5434.33,3877.5 ; 5434.33,3877.5 ccw(c5434.33,3865) 5423.86,3871.82 cw(c5434.33,3865) 5434.33,3877.5 ; 5462,3877.5 ccw(c5462,3846.99) 5436.43,3863.64 cw(c5462,3846.99) 5462,3877.5 ; 5626.82,4110 cw(c5626.82,4056.82) 5664.42,4094.42 ccw(c5626.82,4056.82) 5626.82,4110 ; 5626.82,4110 ccw(c5626.82,4163.18) 5664.42,4125.58 cw(c5626.82,4163.18) 5626.82,4110 ; U1.26@5436.64,3864.04 cw(c5456.83,3855.63) 5456.83,3877.5 ccw(c5456.83,3855.63) U1.26@5436.64,3864.04
NetP2_8: P2.8 U1.21 | length 449.8
  Top Layer w15: U1.21 5675,3615 P2.8 ; 5614.75,3615 cw(c5614.75,3544.75) 5664.42,3594.42 ccw(c5614.75,3544.75) 5614.75,3615 ; 5638.89,3615 ccw(c5638.89,3651.11) 5664.42,3625.58 cw(c5638.89,3651.11) 5638.89,3615
NetP2_9: P2.9 U1.20 | length 887.8
  Top Layer w15: U1.20 5595,3565 ; 5618.08,3545.89 cw(c5598.22,3458.51) P2.9@5674.05,3506.26 ; 5645.63,3524.77 ccw(c5652.28,3554.03) P2.9@5668.26,3528.64 ; 5653.4,3537.87 cw(c5641.56,3485.8) P2.9@5686.75,3514.25 ; P2.9 5650,3510 ; 5595,3565 ccw(c5674.84,3644.83) 5679.16,3532.01 cw(c5674.84,3644.83) 5595,3565 ; 5595,3565 5650,3510 ; 5650,3510 cw(c5650,3500.59) 5658.98,3503.4 ccw(c5650,3500.59) 5650,3510 ; 5650,3510 ccw(c5650,3519.41) 5658.98,3516.6 cw(c5650,3519.41) 5650,3510 ; 5619.28,3540.72 ccw(c5676.63,3598.06) 5679.73,3517.02 cw(c5676.63,3598.06) 5619.28,3540.72 ; 5643.57,3516.43 ccw(c5678.42,3551.29) 5680.31,3502.03 cw(c5678.42,3551.29) 5643.57,3516.43
NetP5_1: P5.1 U2.8 | length 527.5
  Top Layer w20: U2.8 5485,2715 5580,2810 P5.1 ; 5632.86,2810 cw(c5632.86,2762.86) 5666.19,2796.19 ccw(c5632.86,2762.86) 5632.86,2810 ; 5632.86,2810 ccw(c5632.86,2857.14) 5666.19,2823.81 cw(c5632.86,2857.14) 5632.86,2810
NetP5_4: P5.4 U2.5 | length 510.9
  Top Layer w20: U2.5 5405,2565 5460,2510 P5.4 ; 5632.86,2510 cw(c5632.86,2462.86) 5666.19,2496.19 ccw(c5632.86,2462.86) 5632.86,2510 ; 5632.86,2510 ccw(c5632.86,2557.14) 5666.19,2523.81 cw(c5632.86,2557.14) 5632.86,2510
PVDD: C5.2 P2.12 R2.2 U1.17 | length 2800.3
  Top Layer w15: U1.17 5480,3415 5680,3215 P2.12
  Top Layer w20: P2.12@5679.74,3210.39 cw(c5698.32,3182.47) 5715.1,3211.52 ; P2.12 5704.5,3185.5 ; P2.12@5686.03,3191.43 cw(c5697.81,3155.15) 5716.88,3188.18 cw(c5735.08,3219.7) P2.12@5699.23,3213.39 ; P2.12@5690.82,3193.74 cw(c5718.25,3152.52) 5743.01,3195.4 ; C5.2 R2.2 6609.5,3184.5 5898.99,3184.5 5897.99,3185.5 5704.5,3185.5 ; 5704.5,3185.5 cw(c5719.33,3200.33) 5698.96,3205.34 ccw(c5719.33,3200.33) 5704.5,3185.5 ; 5704.5,3185.5 ccw(c5689.67,3170.67) 5684.66,3191.04 cw(c5689.67,3170.67) 5704.5,3185.5 ; R2.2@6597.58,3197.42 cw(c6566.4,3228.6) 6566.4,3184.5 ccw(c6566.4,3228.6) R2.2@6597.58,3197.42 ; R2.2@6597.58,3197.42 ccw(c6567.61,3227.39) 6610,3227.39 ; R2.2@6597.58,3197.42 ccw(c6567.61,3227.39) 6610,3227.39 ; 6610,3227.39 ccw(c6652.39,3227.39) 6622.42,3197.42 cw(c6652.39,3227.39) 6610,3227.39 ; 6610,3677.58 cw(c6647.42,3677.58) 6620.96,3704.04 ccw(c6647.42,3677.58) 6610,3677.58 ; 6610,3677.58 ccw(c6572.58,3677.58) 6599.04,3704.04 cw(c6572.58,3677.58) 6610,3677.58 ; P2.12@5679.67,3209.67 ccw(c5738.01,3268.01) 5738.01,3185.5 cw(c5738.01,3268.01) P2.12@5679.67,3209.67 ; P2.12@5693.81,3223.81 ccw(c5786.29,3316.29) 5786.29,3185.5 cw(c5786.29,3316.29) P2.12@5693.81,3223.81 ; 6568.82,3184.5 cw(c6568.82,3143.82) 6597.58,3172.58 ccw(c6568.82,3143.82) 6568.82,3184.5
PVSS: C5.1 P2.11 R4.1 U1.18 | length 2339.6
  Top Layer w15: U1.18 5525,3465 P2.11 ; 5653.88,3325.29 ccw(c5684.83,3333.58) P2.11@5678.4,3302.19 ; 5664.71,3336.12 cw(c5656.42,3305.17) P2.11@5687.81,3311.6 ; 5642.4,3347.6 cw(c5604.79,3310) 5657.97,3310 ccw(c5604.79,3310) 5642.4,3347.6 ; 5642.4,3347.6 ccw(c5680,3385.21) 5680,3332.03 cw(c5680,3385.21) 5642.4,3347.6
  Top Layer w20: P2.11 6085,3310 6160,3385 6160,3545 6275,3660 6455,3660 C5.1 ; C5.1@6620,3825 R4.1 ; 5727.14,3310 cw(c5727.14,3357.14) 5693.81,3323.81 ccw(c5727.14,3357.14) 5727.14,3310 ; 5727.14,3310 ccw(c5727.14,3262.86) 5693.81,3296.19 cw(c5727.14,3262.86) 5727.14,3310 ; 6583.54,3788.54 cw(c6610,3762.08) 6610,3799.5 ccw(c6610,3762.08) 6583.54,3788.54 ; 6583.54,3788.54 ccw(c6557.08,3815) 6594.5,3815 cw(c6557.08,3815) 6583.54,3788.54 ; 6620,3907.61 cw(c6662.39,3907.61) 6632.42,3937.58 ccw(c6662.39,3907.61) 6620,3907.61 ; 6620,3907.61 ccw(c6577.61,3907.61) 6607.58,3937.58 cw(c6577.61,3907.61) 6620,3907.61
SCKT: P1.5 P4.3 U1.10 U2.2 | length 3265.2
  Top Layer w15: P1.5@4773.1,3428.99 cw(c4819.34,3402.29) 4805.52,3453.87 ; P1.5 4815,3425 ; P1.5@4786.09,3421.49 cw(c4863.69,3376.68) 4840.5,3463.24 ; P1.5@4786.21,3421.71 cw(c4818.23,3404.77) 4808.85,3439.76 ; P1.5@4791.01,3444.08 ccw(c4806.02,3470.06) 4813.78,3441.08 ; U1.10 4905,3515 4815,3425 ; 4815,3425 cw(c4815,3441.79) 4799.86,3434.53 ccw(c4815,3441.79) 4815,3425 ; 4815,3425 ccw(c4815,3408.21) 4799.86,3415.47 cw(c4815,3408.21) 4815,3425 ; P1.5@4780,3417.03 ccw(c4780,3482.28) 4826.14,3436.14 cw(c4780,3482.28) P1.5@4780,3417.03 ; P1.5@4780,3432.03 ccw(c4780,3533.49) 4851.75,3461.75 cw(c4780,3533.49) P1.5@4780,3432.03 ; P1.5@4780,3447.03 ccw(c4780,3584.7) 4877.35,3487.35 cw(c4780,3584.7) P1.5@4780,3447.03
  Top Layer w20: 4754.08,2733.86 ccw(c4786.68,2742.6) P4.3@4779.91,2709.54 ; 4756.14,2735.92 cw(c4747.4,2703.32) P4.3@4780.46,2710.09 ; P4.3@4779.54,2709.91 ccw(c4812.6,2716.68) 4803.86,2684.08 ; P1.5 4440,3425 4355,3340 4355,3135 P4.3 4825,2665 U2.2 ; P4.3@4780.09,2710.46 cw(c4773.32,2677.4) 4805.92,2686.14 ; 4732.86,3425 cw(c4732.86,3377.86) 4766.19,3411.19 ccw(c4732.86,3377.86) 4732.86,3425 ; 4732.86,3425 ccw(c4732.86,3472.14) 4766.19,3438.81 cw(c4732.86,3472.14) 4732.86,3425 ; 4746.66,2743.34 cw(c4713.33,2710) 4760.47,2710 ccw(c4713.33,2710) 4746.66,2743.34 ; 4746.66,2743.34 ccw(c4780,2776.67) 4780,2729.53 cw(c4780,2776.67) 4746.66,2743.34 ; 4813.34,2676.66 cw(c4846.67,2710) 4799.53,2710 ccw(c4846.67,2710) 4813.34,2676.66 ; 4813.34,2676.66 ccw(c4780,2643.33) 4780,2690.47 cw(c4780,2643.33) 4813.34,2676.66
SDA: P1.12 R1.1 U1.3 | length 1422.8
  Top Layer w20: R1.1 4720,4065 P1.12 4887.5,4125 4907.5,4105 4907.5,3940.93 4983.43,3865 U1.3 ; 4754.08,4101.14 cw(c4786.68,4092.4) P1.12@4779.91,4125.46 ; 4756.14,4099.08 ccw(c4747.4,4131.68) P1.12@4780.46,4124.91 ; 4397.39,4065 cw(c4397.39,4107.39) 4367.42,4077.42 ccw(c4397.39,4107.39) 4397.39,4065 ; 4397.39,4065 ccw(c4397.39,4022.61) 4367.42,4052.58 cw(c4397.39,4022.61) 4397.39,4065 ; 4746.66,4091.66 cw(c4780,4058.33) 4780,4105.47 ccw(c4780,4058.33) 4746.66,4091.66 ; 4746.66,4091.66 ccw(c4713.33,4125) 4760.47,4125 cw(c4713.33,4125) 4746.66,4091.66 ; 4827.14,4125 cw(c4827.14,4172.14) 4793.81,4138.81 ccw(c4827.14,4172.14) 4827.14,4125 ; 4827.14,4125 ccw(c4827.14,4077.86) 4793.81,4111.19 cw(c4827.14,4077.86) 4827.14,4125
SDO: P1.6 P4.4 U1.9 U2.1 | length 3116.9
  Top Layer w15: P1.6 4850,3525 4890,3565 U1.9 ; 4833.18,3525 cw(c4833.18,3578.18) 4795.58,3540.58 ccw(c4833.18,3578.18) 4833.18,3525 ; 4833.18,3525 ccw(c4833.18,3471.82) 4795.58,3509.42 cw(c4833.18,3471.82) 4833.18,3525
  Top Layer w20: v1(4430,3310) 4430,3160 P4.4 4945,2810 5040,2715 U2.1 ; v1(4430,3515) 4465,3515 ; 4754.08,2833.86 ccw(c4786.68,2842.6) P4.4@4779.91,2809.54 ; 4756.14,2835.92 cw(c4747.4,2803.32) P4.4@4780.46,2810.09 ; P1.6 4475,3525 4465,3515 ; 4430,3261.72 cw(c4478.28,3261.72) 4444.14,3295.86 ccw(c4478.28,3261.72) 4430,3261.72 ; 4430,3261.72 ccw(c4381.72,3261.72) 4415.86,3295.86 cw(c4381.72,3261.72) 4430,3261.72 ; 4465,3515 cw(c4465,3535.62) 4447.23,3525.15 ccw(c4465,3535.62) 4465,3515 ; 4465,3515 ccw(c4465,3494.38) 4447.23,3504.85 cw(c4465,3494.38) 4465,3515 ; 4732.86,3525 cw(c4732.86,3477.86) 4766.19,3511.19 ccw(c4732.86,3477.86) 4732.86,3525 ; 4732.86,3525 ccw(c4732.86,3572.14) 4766.19,3538.81 cw(c4732.86,3572.14) 4732.86,3525 ; 4746.66,2843.34 cw(c4713.33,2810) 4760.47,2810 ccw(c4713.33,2810) 4746.66,2843.34 ; 4746.66,2843.34 ccw(c4780,2876.67) 4780,2829.53 cw(c4780,2876.67) 4746.66,2843.34 ; 4827.14,2810 cw(c4827.14,2857.14) 4793.81,2823.81 ccw(c4827.14,2857.14) 4827.14,2810 ; 4827.14,2810 ccw(c4827.14,2762.86) 4793.81,2796.19 cw(c4827.14,2762.86) 4827.14,2810
  Bottom Layer w20: v1(4430,3310) v1(4430,3515) ; 4430,3358.28 cw(c4381.72,3358.28) 4415.86,3324.14 ccw(c4381.72,3358.28) 4430,3358.28 ; 4430,3358.28 ccw(c4478.28,3358.28) 4444.14,3324.14 cw(c4478.28,3358.28) 4430,3358.28 ; 4430,3466.72 cw(c4478.28,3466.72) 4444.14,3500.86 ccw(c4478.28,3466.72) 4430,3466.72 ; 4430,3466.72 ccw(c4381.72,3466.72) 4415.86,3500.86 cw(c4381.72,3466.72) 4430,3466.72
VA: C8.2 P3.2 P5.2 U2.7 | length 7134
  Top Layer w20: 4613.25,4559.8 cw(c4647.01,4550.76) v1(4640,4585) ; 4614.8,4558.25 ccw(c4605.76,4592.01) v1(4640,4585) ; P3.2 5080,4475 v1(5145,4410) ; 5118.25,4435.2 ccw(c5152.01,4444.24) v1(5145,4410) ; 5119.8,4436.75 cw(c5110.76,4402.99) v1(5145,4410) ; U2.7 5530,2665 5575,2710 P5.2 5770,2710 5795,2735 C8.2 6050,2620 6050,2570 5930,2450 5430,2450 5429.53,2450.47 4639.67,2450.47 4155,2935.15 4155,4340 4265,4450 4505,4450 v1(4640,4585) ; 4605.86,4550.86 cw(c4640,4516.72) 4640,4565 ccw(c4640,4516.72) 4605.86,4550.86 ; 4605.86,4550.86 ccw(c4571.72,4585) 4620,4585 cw(c4571.72,4585) 4605.86,4550.86 ; 5080,4477.86 cw(c5127.14,4477.86) 5093.81,4511.19 ccw(c5127.14,4477.86) 5080,4477.86 ; 5080,4477.86 ccw(c5032.86,4477.86) 5066.19,4511.19 cw(c5032.86,4477.86) 5080,4477.86 ; 5110.86,4444.14 cw(c5076.72,4410) 5125,4410 ccw(c5076.72,4410) 5110.86,4444.14 ; 5110.86,4444.14 ccw(c5145,4478.28) 5145,4430 cw(c5145,4478.28) 5110.86,4444.14 ; 5632.86,2710 cw(c5632.86,2662.86) 5666.19,2696.19 ccw(c5632.86,2662.86) 5632.86,2710 ; 5632.86,2710 ccw(c5632.86,2757.14) 5666.19,2723.81 cw(c5632.86,2757.14) 5632.86,2710 ; 5727.14,2710 cw(c5727.14,2757.14) 5693.81,2723.81 ccw(c5727.14,2757.14) 5727.14,2710 ; 5727.14,2710 ccw(c5727.14,2662.86) 5693.81,2696.19 cw(c5727.14,2662.86) 5727.14,2710 ; 5897.58,2735 cw(c5897.58,2697.58) 5924.04,2724.04 ccw(c5897.58,2697.58) 5897.58,2735 ; 5897.58,2735 ccw(c5897.58,2772.42) 5924.04,2745.96 cw(c5897.58,2772.42) 5897.58,2735 ; 5961.46,2708.54 cw(c5987.92,2735) 5950.5,2735 ccw(c5987.92,2735) 5961.46,2708.54 ; 5961.46,2708.54 ccw(c5935,2682.08) 5935,2719.5 cw(c5935,2682.08) 5961.46,2708.54
  Bottom Layer w20: v1(4640,4585) 4815,4410 v1(5145,4410) ; 4674.14,4550.86 cw(c4708.28,4585) 4660,4585 ccw(c4708.28,4585) 4674.14,4550.86 ; 4674.14,4550.86 ccw(c4640,4516.72) 4640,4565 cw(c4640,4516.72) 4674.14,4550.86 ; 5096.72,4410 cw(c5096.72,4361.72) 5130.86,4395.86 ccw(c5096.72,4361.72) 5096.72,4410 ; 5096.72,4410 ccw(c5096.72,4458.28) 5130.86,4424.14 cw(c5096.72,4458.28) 5096.72,4410

## Polygon pours and split planes (outlines as drawn)
GROUND on Bottom Layer "Ground" (solid, pour order 8): 4040,4760 4040,2350 4035,2345 6725,2345 6725,4765
GROUND on Top Layer "Ground" (solid, pour order 6): 4035,4765 4035,2345 6705,2345 6715,2355 6720,2350 6720,2345 6720,4765

## Keep-outs
Keep-Out Layer:
  lines w10: 4030,4750 4030,4825 4035,4830 6765,4830 6765,2335 4050,2335 4030,2355 4030,4765

## Other copper
Top Layer:
  text "Riley Duffy" at 5880,4575 h60